# Altium PCB EverySyncBoard.PcbDoc.pcbdoc (part 2 of 2)
Units mil, origin at the board's own origin, x right, y up, seen from the top; angles counter-clockwise.
Board outline 3490 x 2630 mil, 2 copper layers (Top Layer, Bottom Layer); 156 components, 115 nets, 534 pads, 233 vias.
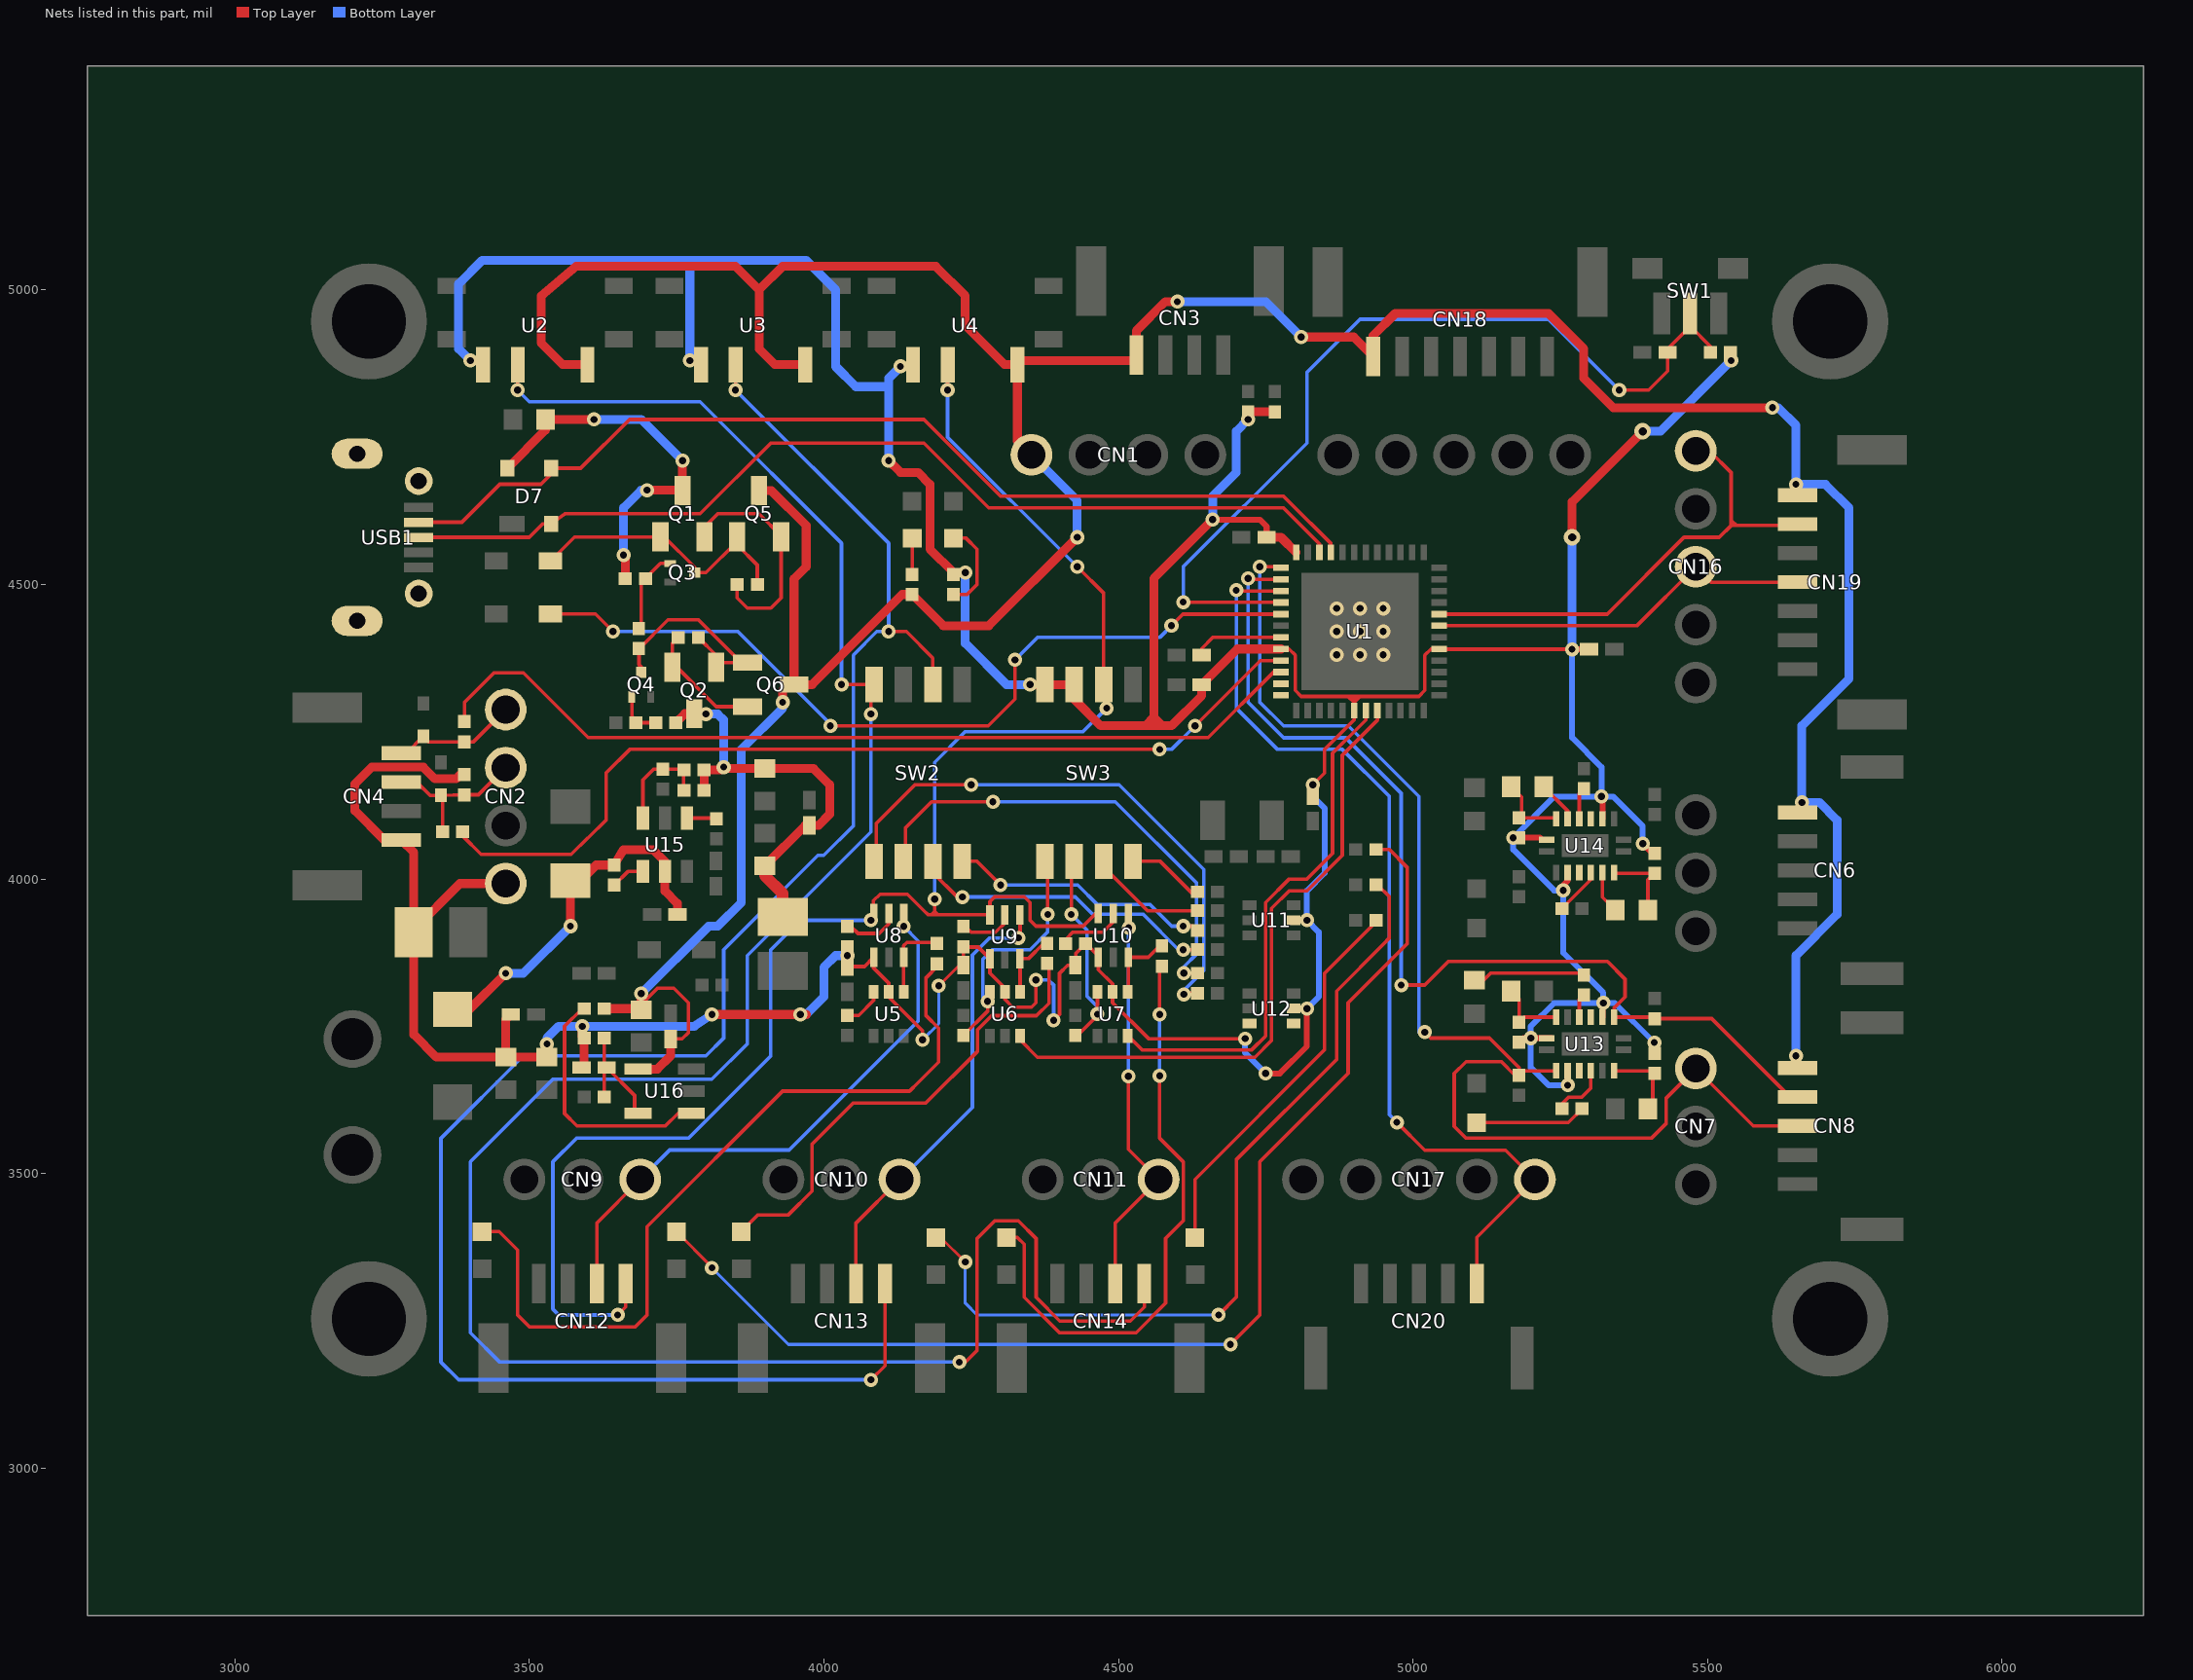
[diagram p2: the nets of this part, all layers, seen from the top]

## Via types
v1: diameter 24, hole 12, Top Layer to Bottom Layer, 231 vias
v2: diameter 28, hole 14, Top Layer to Bottom Layer, 2 vias

## Nets (pads, with @x,y where several pads share a name; then routed paths per layer and width w, separated by ;. In a path a pad name is that pad's centre, name@x,y a point inside that pad or via, vN(x,y) a via of type N, cw(c..) or ccw(c..) an arc to the next point about the centre after c; other vN are vias at no path point) (continued)
PA24_USB_DM: D7.3 U1.33 USB1.2 | length 1729
  Top Layer w6: USB1.2@3312.2,4605.58 3385.6,4605.59 3450,4670 3520,4670 3537.4,4687.39 D7.3@3537.4,4697.24 3587.25,4697.24 3670,4780 4170,4780 4300,4650 4380,4650 4780,4650 4790,4640 4860.79,4569.21 U1.33@4860.79,4554.15
PA25_USB_DP: D7.2 U1.34 USB1.3 | length 1679.5
  Top Layer w6: USB1.3@3312.2,4579.99 3500.01,4580 3522.76,4602.75 D7.2@3537.4,4602.75 3560,4620 3580,4620 3790,4620 3910,4740 4170,4740 4280,4630 4380,4630 4780,4630 4841.1,4568.9 U1.34@4841.1,4554.15
PA27_GPIO: CN17.1 CN20.1 U1.39 | length 1656.8
  Top Layer w6: v1(4700,4490) 4701.1,4488.9 U1.39@4775.85,4488.9 ; v1(4972.5,3587) 5019.81,3539.69 5060.27,3539.69 5157.27,3539.69 CN17.1@5207.27,3489.69 ; CN20.1@5108.4,3312.99 5108.4,3391.55 CN17.1@5206.85,3490
  Bottom Layer w6: v1(4700,4490) 4700,4290 4769.97,4220 4879.97,4220 4959.97,4140 4960,3600 ; 4959.97,3600 v1(4972.5,3587) ; v1(4972.5,3587) v1@4979.97,3587
PA28_USB_HOST_EN: D4.2 U1.41 | length 1437.7
  Top Layer w6: D4.2@3536.17,4450 3612.15,4450 v1(3641.88,4420.27) ; v1(4011,4260) 4279.01,4260 4324.5,4305.49 v1(4324.5,4372) ; v1(4590,4430) 4609.52,4449.53 U1.41@4775.85,4449.53
  Bottom Layer w6: v1(3641.88,4420.27) 3853.89,4420.27 4011,4263.15 v1(4011,4260) ; v1(4324.5,4372) 4362.5,4410 4570,4410 v1(4590,4430)
PA30_SWCLK: R2.1 U1.45 | length 1591.3
  Top Layer w6: R2.1@3387.27,4079.69 3387.27,4072.69 3418.27,4041.69 3571.27,4041.69 3630.27,4099.69 3630.27,4179.69 3670.57,4220 v1(4570,4220) ; v1(4630,4260) 4740.79,4370.79 U1.45@4775.87,4370.79
  Bottom Layer w6: v1(4570,4220) 4590,4220 v1(4630,4260)
PA31_SWDIO: R3.1 U1.46 | length 1531.1
  Top Layer w6: R3.1@3390,4267.04 3390,4300 3440,4350 3490,4350 3600,4240 4652.47,4240 4763.57,4351.1 U1.46@4775.87,4351.1
PB02_AIN10: U1.47
PB03_GPIO: U1.48
PB08_AIN2: U1.8 U6.3 | length 1111.8
  Top Layer w6: U6.3@4333.09,3736.09 4333.09,3727.06 4362.65,3697.5 4731.47,3697.5 4759.97,3725.97 4759.97,3949.96 4789.97,3980 4819.97,3980 4879.97,4040 4879.97,4210.01 4939.57,4269.54 U1.8@4939.57,4285.85
PB09_AIN3: U1.7 U7.3 | length 902.7
  Top Layer w6: U7.3@4515.59,3742.59 4515.59,3734.41 4540,3710 4726.47,3710 4749.97,3733.46 4749.97,3960 4789.97,4000 4819.97,4000 4863.47,4043.46 4863.47,4213.49 4919.87,4269.84 U1.7@4919.87,4285.85
PB10_S4_SPI_MOSI: CN16.3 CN19.4 U1.19 | length 661.1
  Top Layer w6: U1.19@5044.15,4429.84 5379.79,4429.84 CN16.3@5479.96,4530 5506.06,4503.9 CN19.4@5652.98,4503.9
PB11_S4_SPI_SCK: CN16.1 CN19.2 U1.20 | length 852.5
  Top Layer w6: U1.20@5044.15,4449.53 5329.53,4449.53 5460,4580 ; 5459.97,4580 5519.97,4580 5540,4600 ; CN16.1@5479.96,4726.85 5503.17,4726.85 5539.97,4690 5540,4600 ; 5539.97,4608.26 5549.33,4600 ; CN19.2@5656.51,4600 5540,4600
PB22_S5_TX: CN7.1 CN8.3 R27.2 U1.37 U13.2 | length 2200.3
  Top Layer w6: v1(4739.97,4530) 4774.12,4530 U1.37@4775.85,4528.27 ; v1(5020,3740) 5030,3730 5129.97,3730 5179.97,3679.99 R27.2@5180,3667.04 5172.97,3667.03 5149.97,3690 5089.97,3690 5069.97,3669.96 5069.97,3580.03 5089.97,3560 5404.47,3560 5429.97,3585.46 5429.97,3628.42 CN7.1@5479.99,3678.42 ; R27.2@5180,3667.04 5187.39,3674.43 U13.2@5242.86,3674.42 ; CN7.1@5479.99,3678.42 5577.71,3580.71 CN8.3@5652.98,3580.71
  Bottom Layer w6: v1(4739.97,4530) 4739.97,4300 4780.27,4259.69 4890.27,4259.69 5009.97,4140 5009.97,3740 v1(5020,3740)
PB23_S5_RX: CN8.2 R25.2 U1.38 U13.10 | length 1765
  Top Layer w6: v1(4720,4510) 4721.42,4508.58 U1.38@4775.85,4508.58 ; v1(4980,3820) 5019.97,3820 5059.97,3860 5318.47,3860 5330,3860 5360,3830 5360,3800 5341.28,3781.28 U13.10@5341.28,3765.56 5407.39,3765.57 R25.2@5410,3762.96 5507.04,3762.96 5640.09,3629.91 CN8.2@5652.98,3629.91
  Bottom Layer w6: v1(4720,4510) 4719.97,4300 4780.27,4239.69 4885.77,4239.69 4980,4145.46 v1(4980,3820)
PD_CAM1: R17.1 SW3.4 | length 134.8
  Top Layer w6: SW3.4@4525.01,4029.99 4571.15,4030 4628.17,3972.98 R17.1@4634.17,3978.26
PD_CAM2: R19.1 SW2.4 | length 447.6
  Top Layer w6: SW2.4@4235.01,4029.99 4260,4030 v1(4300,3990) ; v1(4610,3920) 4626.07,3920 R19.1@4633.81,3912.26
  Bottom Layer w6: v1(4300,3990) 4431,3990 4464.5,3956.5 4554,3956.5 4590.5,3920 v1(4610,3920)
PD_CAM3: R21.1 SW2.2 | length 810.4
  Top Layer w5.91: SW2.2@4138.89,4030.53 4138.89,4087.27 4182.89,4131.27 v1(4286.89,4131.26) ; v1(4610.89,3840.26) R21.1@4633.17,3840.27
  Bottom Layer w5.91: v1(4286.89,4131.26) 4494.74,4131.26 4632.84,3993.16 4632.84,3872.84 4610.89,3850.88 v1(4610.89,3840.26)
PU_CAM1: R16.2 SW3.3 | length 199.1
  Top Layer w6: SW3.3@4475.01,4029.99 4475.01,4020.49 4549.24,3946.26 R16.2@4633.81,3946.26
PU_CAM2: R18.2 SW2.3 | length 522.8
  Top Layer w6: SW2.3@4185.01,4029.99 4185.01,4010.99 4226.5,3969.5 v1(4235,3969.5) ; v1(4610,3880) 4634.19,3880 R18.2@4634.45,3880.27
  Bottom Layer w6: v1(4235,3969.5) 4426.65,3969.5 4456.15,3940 4542.18,3940 4602.18,3880 v1(4610,3880)
PU_CAM3: R20.2 SW2.1 | length 956.2
  Top Layer w5.91: SW2.1@4088.89,4030.53 4088.89,4094.26 4154.63,4160 v1(4250,4160)
  Top Layer w6: v1(4610.88,3804.27) 4612.87,3806.26 R20.2@4633.81,3806.26
  Bottom Layer w5.91: v1(4250,4160) 4501.15,4160 4644.74,4016.41 4644.74,3844.74 4610.89,3810.89 v1(4610.88,3804.27)
R2_2: CN2.3 CN4.3 D2.1 R2.2 R4.1 | length 268.7
  Top Layer w6: CN4.3@3282.99,4164.6 3308.9,4164.6 3331.46,4142.04 D2.1@3350,4142.04 ; R2.2@3352.96,4080 3352.96,4139.08 D2.1@3350,4142.04 ; CN2.3@3459.97,4189.16 3413.77,4142.96 R4.1@3390,4142.96 D2.1@3350,4142.04
R3_2: CN2.4 CN4.4 D1.1 R3.2 | length 215.1
  Top Layer w6: CN4.4@3282.99,4213.81 3291.76,4213.81 3320.01,4242.05 3329.1,4232.96 R3.2@3390,4232.96 3405.34,4232.96 CN2.4@3459.97,4287.59
R9_1: R9.1 U5.6 | length 69.5
  Top Layer w5.91: R9.1@4040,3768.54 4059.16,3768.54 4084.41,3793.79 U5.6@4084.39,3808.39
R10_1: LED1.2 R10.1 | length 1368.7
  Top Layer w5.91: LED1.2@3419.86,3401.47 3448.53,3401.47 3480,3370 3480,3260 3500,3240 3680,3240 3700,3260 3700,3410 3930,3640 4145.51,3640 4160.01,3654.5
  Top Layer w6: 4160.01,3654.5 4194.5,3688.99 4194.5,3747 4173.5,3768 4173.5,3832.5 4191.86,3850.85 R10.1@4191.85,3856.22 R10.1@4186.5,3856.22
R10_2: R10.2 U5.4 U8.3 | length 137.7
  Top Layer w5.91: U8.3@4135.47,3867.05 4135.47,3886.85 4140.89,3892.27 4190.6,3892.27 R10.2@4191.89,3890.98 ; U8.3@4135.48,3867.05 4135.59,3866.93 U5.4@4135.57,3808.39
R11_1: LED2.2 R11.1 | length 821.3
  Top Layer w5.91: LED2.2@3859.86,3401.47 3888.4,3430 3940,3430 3980,3470 3980,3549.99 4050.01,3620 4173.51,3620 4260.5,3707 4260.5,3743.5 4285,3768 4361,3768 4382,3789 4382,3856.46 R11.1@4379,3856.46
R11_2: R11.2 U6.4 U9.3 | length 110.5
  Top Layer w5.91: U6.4@4333.09,3810.89 U9.3@4333.06,3864.77 4347.28,3864.77 4373.05,3890.54 R11.2@4379,3890.54
R12_1: LED3.2 R12.1 | length 1013.3
  Top Layer w6: LED3.2@4309.86,3391.47 4328.53,3391.47 4340,3380 4340,3290 4400,3230 4530,3230 4580,3280 4580,3390 4610,3420 4610,3520 4570,3560 v1(4570,3666) ; v1(4570,3770) 4570,3848.36 R12.1@4573.85,3852.22
  Bottom Layer w6: v1(4570,3666) v1(4570,3770)
R12_2: R12.2 U7.4 U10.3 | length 126.3
  Top Layer w6: U7.4@4515.57,3808.39 4516.95,3809.76 4516.95,3867.04 4550.55,3867.04 4569.81,3886.3 R12.2@4573.85,3886.3 R12.2@4575.88,3887.27
R13_2: R13.2 U8.5 | length 99.5
  Top Layer w6: R13.2@4040,3919.3 4046.2,3919.3 4058,3907.5 4094,3907.5 4110.11,3923.61 U8.5@4110.07,3941.51
R14_2: R14.2 U9.5 | length 95.1
  Top Layer w5.91: R14.2@4236.85,3919.3 4240.2,3919.3 4250,3909.5 4291.5,3909.5 4307.51,3925.5 U9.5@4307.47,3939.21
R15_2: R15.2 U10.5 | length 118.5
  Top Layer w5.91: R15.2@4410.46,3890.5 4410.46,3897.49 4422.97,3910 4474.01,3910 4493.89,3929.88 U10.5@4493.89,3944.56
R22_1: LED4.2 R22.1 | length 1436.7
  Top Layer w5: LED4.2@4189.86,3391.47 4198.53,3391.47 v1(4240,3350)
  Top Layer w6: v1(4670,3260) 4700,3290 4700,3523.49 4870.27,3693.69 4870.27,3809.69 4950.27,3889.69 ; R22.1@4937.07,3990 4939.97,3990 4959.97,3970 4959.97,3900 4950,3890
  Bottom Layer w5: v1(4240,3350) 4240,3280 4260,3260 v1(4670,3260)
R23_1: LED5.2 R23.1 | length 665.8
  Top Layer w6: LED5.2@4629.86,3391.47 4629.87,3489.9 4849.97,3710 4849.97,3780 ; 4850,3780 4850,3840 4937.04,3927.04 R23.1@4937.04,3930
R24_1: LED6.2 R24.1 | length 2019.8
  Top Layer w5: LED6.2@3749.86,3401.47 3810,3341.34 v1(3810,3340)
  Top Layer w6: v1(4690,3210) 4739.97,3260 4739.97,3352.04 4739.97,3520 4889.97,3670 4889.97,3790 4989.97,3890 4989.97,4020 4959.97,4050 R24.1@4937.07,4050
  Bottom Layer w5: v1(3810,3340) 3940,3210 v1(4690,3210)
R29_1: C12.2 R29.1 U13.15 | length 124.9
  Top Layer w6: C12.2@5166.57,3810 5180,3796.57 R29.1@5180,3757.04 5188.53,3765.57 U13.15@5242.86,3765.56
R31_1: C13.2 R31.1 U13.7 | length 134.4
  Top Layer w6: U13.7@5341.28,3674.42 5405.53,3674.43 R31.1@5410,3669.96 ; C13.2@5397.56,3610 5407,3619.44 R31.1@5407,3669.96
R32_1: R32.1 RX2.1 | length 188.7
  Top Layer w6: RX2.1@5108.12,3586.5 5263.54,3586.5 R32.1@5287.04,3610
R35_1: R35.1 TX2.2 | length 177.8
  Top Layer w6: TX2.2@5119.97,3828.34 5131.57,3840 5289.97,3840 R35.1@5290,3837.04
R37_1: R37.1 U15.4 | length 59.2
  Top Layer w6: R37.1@3643.89,3988.83 3668.24,4013.19 U15.4@3692.97,4013.21
R39_1: R39.1 U15.1 | length 50.3
  Top Layer w6: U15.1@3767.78,4103.35 3817.52,4103.35 R39.1@3817.89,4102.98
R41_1: Q4.1 R41.1 R42.2 | length 77.2
  Top Layer w5.91: Q4.1@3674.26,4309.16 3674.26,4276.61 3685.6,4265.27 R41.1@3714.17,4265.27
R43_1: Q3.1 R43.1 R44.2 | length 144.5
  Top Layer w6: R44.2@3685.85,4425.3 3690,4425.3 3690,4502.96 R43.1@3697.04,4510 3722.78,4535.74 Q3.1@3739.16,4535.74
R44_1: Q2.1 Q4.3 Q6.1 R44.1 R47.1 | length 396.3
  Top Layer w5.91: Q4.3@3690.27,4350.69 3690.27,4359.69 3686.27,4363.69 3686.27,4390.69 3735.58,4440 3787.04,4440 3859.65,4367.39 Q6.1@3870.63,4367.4
  Top Layer w6: R47.1@3787.04,4410 3817.4,4379.64 Q2.1@3817.4,4359.37 3825.43,4367.4 Q6.1@3870.63,4367.4
R45_1: C20.1 R38.1 R45.1 U15.3 | length 177
  Top Layer w6: U15.3@3692.98,4103.35 3692.98,4168.36 3710.89,4186.27 3761.17,4186.27 3762.17,4185.27 C20.1@3762.17,4150.27
R46_1: D5.2 Q1.1 Q3.3 Q5.1 R46.1 | length 488.5
  Top Layer w6: D5.2@3536.17,4540 3576.8,4580.63 Q1.1@3722.6,4580.63 3729.37,4580.63 3780.85,4529.15 Q3.3@3780.85,4520 3800.01,4520 3852.6,4572.59 Q5.1@3852.6,4580.63 3852.6,4567.4 3887.04,4532.96 R46.1@3887.04,4500
R46_2: Q1.2 Q5.2 R46.2 | length 388.5
  Top Layer w6: Q1.2@3797.4,4580.63 3797.4,4597.4 3820,4620 3890,4620 3927.4,4582.6 Q5.2@3927.4,4580.63 3927.4,4477.39 3910,4460 3870,4460 3852.96,4477.04 R46.2@3852.96,4500
R47_2: Q2.2 Q6.2 R47.2 | length 210.6
  Top Layer w6: R47.2@3752.96,4410 3742.6,4399.64 Q2.2@3742.6,4359.37 3750.63,4359.37 3817.4,4292.6 Q6.2@3870.63,4292.6
R48_1: R48.1 U16.1 | length 432.2
  Top Layer w6: R48.1@3592.96,3780 3590.01,3780 3560,3750 3560,3602 3581,3581 3731,3581 3752.61,3602.6 U16.1@3781.19,3602.6
R49_1: LED11.2 R49.1 | length 61.5
  Top Layer w5.91: R49.1@4150,4517.04 4150.01,4560 4150.14,4560.13 LED11.2@4150.14,4578.52
R50_1: LED12.2 R50.1 | length 154.6
  Top Layer w6: R50.1@4220,4482.95 4242.96,4482.95 4260,4499.99 4260,4560 4241.48,4578.52 LED12.2@4220.14,4578.52
R51_1: C26.1 R51.1 R52.2 U16.5 | length 197
  Top Layer w6: R52.2@3627.04,3630 R51.1@3627.04,3730 ; C26.1@3631.46,3680 3678.82,3632.64 U16.5@3678.82,3602.6
RX2LED: R32.2 U13.5 | length 97.8
  Top Layer w6: R32.2@5252.96,3610 5252.97,3618.45 5263.97,3629.5 5286.47,3629.5 5301.87,3644.94 U13.5@5301.91,3674.42
RXLED: R34.2 U14.5 | length 81.4
  Top Layer w6: R34.2@5252.96,3950 5301.87,3998.95 U14.5@5301.87,4011.15
SLAVECAM2: R7.1 SW3.1 U6.6 | length 400.9
  Top Layer w6: R7.1@4236.85,3734.46 4277.88,3775.48 v1(4277.88,3792.27) ; SW3.1@4375.01,4029.99 4380,4025.01 v1(4380,3940)
  Bottom Layer w6: v1(4277.88,3792.27) 4270,3800.15 4270,3863.99 4286.01,3880 4350,3880 4380,3909.99 v1(4380,3940)
SLAVECAM3: R8.1 SW3.2 U7.6 | length 376.9
  Top Layer w6: v1(4420,3940) 4420,4030 SW3.2@4425.01,4029.99 ; R8.1@4426.85,3734.46 4430.46,3734.46 4465.5,3769.5 v1(4464.41,3770.59) U7.6@4464.39,3808.39
  Bottom Layer w6: v1(4420,3940) 4446.5,3913.5 4446.5,3801 4465.5,3782 v1@4465.5,3769.5
TRIGC1: CN9.1 CN12.2 U8.4 | length 986.3
  Top Layer w5.91: v1(4135.48,3919.52) U8.4@4135.47,3941.49 ; U8.4@4135.48,3941.49 U8.4@4135.48,3944.56
  Top Layer w6: CN12.2@3614.59,3312.99 3614.59,3416.19 CN9.1@3688.41,3489.99
  Bottom Layer w6: CN9.1@3688.41,3489.99 3738.41,3540 3941,3540 4160,3759 4160,3895 v1(4135.48,3919.52)
TRIGC2: CN10.1 CN13.2 U9.4 | length 768.4
  Top Layer w6: CN13.2@4054.59,3312.99 4054.59,3416.19 CN10.1@4128.41,3489.99 ; v1(4330,3900) 4333.09,3903.1 U9.4@4333.06,3939.21
  Bottom Layer w6: CN10.1@4130.55,3490.7 4252.14,3612.29 4252.14,3870.69 4281.45,3900 v1(4330,3900)
TRIGC3: CN11.1 CN14.2 U10.4 | length 680.8
  Top Layer w5.91: U10.4@4516.94,3941.49 4516.94,3917.56 v1(4517.5,3917)
  Top Layer w6: CN14.2@4494.6,3312.99 4494.6,3416.17 CN11.1@4568.43,3489.99 4517,3541.43 v1(4517,3665)
  Bottom Layer w5.91: v1(4517,3665) 4517,3916.5 v1(4517.5,3917)
TX2LED: R35.2 U13.13 | length 40.6
  Top Layer w6: U13.13@5282.23,3765.56 5282.22,3795.19 R35.2@5290,3802.96
TXLED: R36.2 U14.13 | length 53.9
  Top Layer w6: U14.13@5282.23,4102.26 5282.22,4145.18 R36.2@5290,4152.96
U1_40: C4.2 R1.1 SW1.2 U1.40 | length 1549.5
  Top Layer w6: v1(4610,4470) 4775.06,4470 U1.40@4775.85,4469.21 ; v1(5350,4830) 5400,4830 5432.04,4862.04 C4.2@5432.04,4893.88 ; C4.2@5432.04,4893.39 5432.04,4899.85 5470,4937.81 SW1.2@5470,4959.99 5470,4938.97 5504.54,4904.42 R1.1@5504.54,4894.39
  Bottom Layer w6: v1(4610,4470) 4610,4529.99 4819.97,4740 4819.97,4860 4909.97,4950 5229.97,4950 v1(5350,4830)
U1_43: C3.1 U1.43 | length 153.6
  Top Layer w6: C3.1@4641.46,4380 4641.46,4391.45 4660.17,4410.16 U1.43@4775.87,4410.16
U14_6: C15.1 U14.6 | length 73
  Top Layer w6: U14.6@5321.59,4011.15 5321.59,3969.2 C15.1@5343.57,3947.22
U14_7: C15.2 R33.1 U14.7 | length 136.5
  Top Layer w6: U14.7@5341.27,4011.15 5342.74,4009.68 R33.1@5410,4009.68 5398.69,3998.37 C15.2@5398.68,3947.22
U14_14: C14.1 U14.14 | length 71.3
  Top Layer w6: C14.1@5221.68,4156.73 5262.53,4115.88 U14.14@5262.54,4102.26
U14_15: C14.2 R30.1 U14.15 | length 123.7
  Top Layer w6: C14.2@5166.57,4156.73 5184.12,4139.17 R30.1@5184.12,4103.77 ; R30.1@5180,4103.77 5241.38,4103.76 U14.15@5242.85,4102.29
VBUS_5V: D7.4 L1.1 Q1.3 R43.2 | length 655.6
  Top Layer w15: D7.4@3462.6,4697.24 3527.56,4762.2 L1.1@3527.56,4779.99 v1(3610,4779.99) ; v1(3660,4550) 3662.96,4547.04 R43.2@3662.96,4510 ; v1(3700,4660) 3759.37,4660 Q1.3@3760,4659.37 v1(3760,4710)
  Bottom Layer w15: v1(3610,4779.99) 3690.01,4779.99 v1(3760,4710) ; v1(3660,4550) 3660,4630 3690,4660 v1(3700,4660)
VCAM1: CN12.1 SW3.6 U4.2 U8.6 U9.6 U10.6 | length 3041
  Top Layer w5.91: v1(4080,3930) 4080,3937.19 4084.29,3941.49 4084.29,3963.17 4095.38,3974.27 4141.88,3974.27 4168.38,3947.77 4176.93,3939.22 U9.6@4281.88,3939.21
  Top Layer w6: v1(3650,3260) 3663.8,3273.8 CN12.1@3663.8,3312.99 ; 4182.47,3939.22 4188,3944.75 ; v1(4188,3966) 4188,3944.75 ; 4193.5,3939.22 4188,3944.75 ; v1(4210,4830) 4210,4872.6 U4.2@4210.47,4873.07 ; U9.6@4281.88,3939.21 4281.92,3961.92 4290,3970 4340,3970 4350,3960 4350,3930 4360,3920 4440,3920 4461.49,3941.49 U10.6@4465.78,3941.51 ; v1(4430,4530) 4475.01,4484.99 SW3.6@4475.01,4329.99 4480,4325.01 v1(4480,4290)
  Bottom Layer w5.91: v1(4188,3966) 4188,4198 4239.75,4249.75 4439.74,4249.75 v1(4480,4290)
  Bottom Layer w6: v1(3650,3260) 3550,3260 3540,3270 3540,3520 3580,3560 3770,3560 3910,3700 3910,3880 3960,3930 v1(4080,3930) ; v1(4210,4830) 4210,4750 v1(4430,4530)
VCAM2: CN13.1 SW2.6 U3.2 | length 3368.7
  Top Layer w6: v1(3850,4830) U3.2@3850.47,4873.07 ; v1(4080,3150) 4103.8,3173.8 CN13.1@4103.8,3312.99 ; v1(4110,4420) 4140,4420 4185.01,4374.99 SW2.6@4185.01,4329.99
  Bottom Layer w6: v1(3850,4830) 4110,4570 v1(4110,4420) 4090.01,4420 4050,4380 4050,4170 4050,4090 4000,4040 3990,4040 3830,3880 3830,3730 3800,3700 3490,3700 3350,3560 3350,3180 3380,3150 v1(4080,3150)
VCAM3: CN14.1 SW2.8 U2.2 | length 4091.4
  Top Layer w6: v1(3480,4830) U2.2@3480.47,4873.07 ; v1(4030,4329.99) SW2.8@4085.01,4329.99 4080,4324.99 v1(4080,4280) ; v1(4230,3180) 4240.01,3180 4260.27,3200.26 4260.27,3390.26 4290,3420 4330,3420 4360.27,3389.73 4360.27,3290 4400.27,3249.69 4520.27,3249.69 4544.27,3273.69 CN14.1@4544.27,3312.69
  Bottom Layer w6: v1(3480,4830) 3500,4810 3740,4810 3790,4810 4030,4570 v1(4030,4329.99) ; v1(4080,4280) 4080,4080 3870,3870 3870,3720 3810,3660 3540,3660 3400,3520 3400,3230 3450,3180 3550,3180 v1(4230,3180)
VCC_3V3: C5.1 C6.1 C7.1 C8.1 C9.1 C10.1 C11.1 C26.2 C27.2 C28.2 C29.2 CN2.1 CN4.1 L3.2 R1.2 R4.2 R5.2 R6.2 R13.1 R14.1 R15.1 R29.2 R30.2 R31.2 R33.2 R50.2 R51.2 SW3.7 SW3.8 U1.6 U1.17 U1.36 U1.44 U2.3 U3.3 U4.3 U5.5 U6.5 U7.5 U8.1 U9.1 U10.1 U11.5 U12.5 U13.3 U13.11 U13.16 U14.3 U14.11 U14.16 | length 10435.8
  Top Layer w5: v1(4195,3819) 4229.71,3853.71 C9.1@4236.85,3853.72
  Top Layer w6: R13.1@4039.88,3884.55 C11.1@4040,3851.46 ; v1(4040,3870) C11.1@4040,3851.46 ; C11.1@4041.89,3851.98 4040.54,3851.98 C11.1@4040,3851.46 ; v1(4167.5,3727) 4167.5,3742.5 4110,3800 U5.5@4109.98,3808.39 4110,3823.5 4084.52,3848.98 4084.52,3867.04 4068.93,3851.45 C11.1@4040,3851.46 ; C9.1@4236.88,3849.98 4236.88,3884.55 4262.14,3884.55 U9.1@4281.88,3864.77 4281.91,3840.09 4307.5,3814.5 U6.5@4307.48,3808.39 4307.5,3795.5 4320.5,3782.5 4352.5,3782.5 4360,3790 v1(4360,3828.5) ; v1(4390,3760) 4400,3770 4400,3840 4413.71,3853.71 C10.1@4426.85,3853.72 ; C10.1@4427.86,3853.71 4427.86,3873.82 R15.1@4444.54,3890.5 4466.5,3868.54 4466.5,3849 ; C10.1@4427.89,3849.98 C10.1@4430.01,3852.11 ; U10.1@4465.77,3867.04 4465.77,3846.23 4490,3822 U7.5@4489.98,3808.39 4490,3790 4551,3729 v1(4715,3729) ; U1.44@4775.85,4390.47 4789.53,4390.47 4800,4380 4800,4320 4810,4310 4890,4310 ; U11.5@4797.38,3929.99 v1(4820,3930) ; v1(4830,4160) 4849.97,4180 4849.97,4219.99 4900.17,4270.16 U1.6@4900.16,4285.85 ; 4900.32,4300.16 4900.32,4310 ; v1(5270,4390) 5044.62,4390 5044.15,4390.47 5030.47,4390.47 5020,4380 5020,4320 5010,4310 4910,4310 ; 4890,4310 4910,4310 ; 4890,4310 4900.16,4299.84 U1.6@4900.16,4285.85 ; U1.6@4900.16,4285.85 4900.16,4300.16 4910,4310
  Top Layer w10: v1(4660,4610) 4740,4610 4751.46,4598.54 C8.1@4751.46,4580 ; v1(4750,3670) 4773.97,3670 4819.97,3715.96 v1(4820,3780) ; R29.2@5180,3722.96 5187.04,3730 v1(5200,3730) 5200.16,3729.84 U13.16@5234.75,3729.84 ; R30.2@5184.13,4069.68 5183.81,4070 v1(5170,4070) 5215.46,4070 U14.16@5218.89,4066.57 ; v1(5255,3980.5) 5254.97,3989.49 5262.57,3997.03 U14.3@5262.57,4011.15 ; v1(5262.5,3650) U13.3@5262.54,3674.42 ; v1(5270,4390) C6.1@5298.54,4390 ; v1(5320,4140) 5321.59,4138.41 U14.11@5321.6,4102.26 ; U13.11@5321.6,3765.56 5321.59,3788.1 v1(5323,3789.5) ; v1(5389.97,4060) 5406.21,4043.76 R33.2@5410,4043.76 ; R31.2@5407,3704.04 5407,3720 v1(5409.5,3722.5)
  Top Layer w15: R4.2@3390,4177.04 3383.04,4177.04 3376,4170 3340,4170 3320,4190 3232.51,4190 3204,4161.5 3204,4116 3253.8,4066.2 CN4.1@3282.99,4066.2 3304.04,4045.16 L3.2@3304.04,3910 ; v1(3400,4880) 3414.49,4880 U2.3@3421.42,4873.07 ; CN2.1@3459.97,3992.31 3382.31,3992.31 3304.04,3914.03 L3.2@3304.04,3910 ; C29.2@3468.54,3770 3460,3761.46 C27.2@3460,3697.55 ; v1(3530,3720) C28.2@3530,3697.55 C27.2@3460,3697.55 ; C26.2@3588.54,3680 3592.96,3684.42 R51.2@3592.96,3730 3590,3732.96 v1(3590,3750) ; v1(3772.61,4880) 3784.49,4880 U3.3@3791.42,4873.07 ; v1(3810,3770) v1@3969.99,3770 ; v1(4110,4710) 4130,4690 4160,4690 4180,4670 4180,4560 4220.01,4519.99 R50.2@4220,4517.03 4222.97,4520 v1(4240,4520) ; v1(4130,4870) 4148.34,4870 U4.3@4151.42,4873.07 ; v1(4350,4330) SW3.8@4375.01,4329.99 4415,4330 SW3.7@4425.01,4340 ; SW3.7@4425.01,4329.99 4425.01,4304.99 4470,4260 4590,4260 4641.46,4311.46 C5.1@4641.46,4330 4701.92,4390.47 U1.44@4775.85,4390.47 ; 4545.94,4260 4560,4274.46 ; 4574.45,4260 4560,4274.46 ; v1(4660,4610) 4560,4510 4560,4274.46 ; v1(4720,4780) R5.2@4720,4792.96 R6.2@4765.5,4792.96 ; C8.1@4751.46,4580 4775.88,4580 U1.36@4801.73,4554.15 ; v2(5270,4580) 5270,4640 v2(5390,4760) ; R1.2@5538.62,4893.88 5540,4892.5 v1(5540,4880) ; L3.2@3304.04,3910 3304.04,3735.96 3342.44,3697.56 C27.2@3460,3697.55
  Bottom Layer w5: v1(4167.5,3727) 4195,3754.5 v1(4195,3819)
  Bottom Layer w6: v1(4360,3828.5) 4381.5,3828.5 4390,3820 v1(4390,3760)
  Bottom Layer w10: v1(4715,3729) 4715,3705 v1(4750,3670) ; v1(4820,3780) 4840,3800 4840,3910 v1(4820,3930) ; v1@4820,3940 v1(4820,3930) ; v1@4829.97,4150 4829.97,4140 4849.97,4120 4849.97,4010 4820,3980.03 v1(4820,3930) ; v1(5170,4070) 5169.97,4050 5239.47,3980.5 v1(5255,3980.5) ; v1(5170,4070) 5240,4140 v1(5320,4140) ; v1(5255,3980.5) 5255,3875 5323,3807 v1(5323,3789.5) 5239.5,3789.5 5200,3750 v1(5200,3730) 5200,3680 5230,3650 v1(5262.5,3650) ; v1(5270,4390) 5270,4239.97 5320,4189.97 v1(5320,4140) ; v1(5323,3789.5) 5342.47,3789.5 v1(5409.5,3722.5) ; v1(5389.97,4060) 5389.97,4090 5339.97,4140 v1(5320,4140)
  Bottom Layer w15: v1(3400,4880) 3380,4900 3380,5010 3420,5050 3970,5050 4020,5000 4020,4870 4054.25,4835.75 4110,4835.75 ; v1(3530,3720) 3530,3730 3550,3750 v1(3590,3750) 3780,3750 v1(3810,3770) ; v1(3772.61,4880) 3772.61,5050 ; v1(3960,3770) 3970.01,3770 4000,3800 4000,3850 4020,3870 v1(4040,3870) ; v1(4110,4710) 4110,4850 v1(4130,4870) ; v1(4240,4520) 4240,4400 4310,4330 v1(4350,4330) ; v1(4660,4610) 4660,4649.99 4700,4690 4700,4759.99 v1(4720,4780) ; v1(5270,4390) v2(5270,4580) ; v2(5390,4760) 5420,4760 v1(5540,4880)
VCC_5V: C24.2 C25.2 CN1.1 CN3.1 CN6.1 CN8.1 CN18.1 CN19.1 Q5.3 Q6.3 R48.2 R49.2 U2.1 U3.1 U4.1 U16.4 | length 6595.9
  Top Layer w6: C24.2@3690,3777.55 3690,3787 3717.5,3814.5 3745.5,3814.5 3770,3790 3770,3739 3759.55,3728.54 C25.2@3740,3728.54
  Top Layer w15: U2.1@3598.58,4873.07 3556.93,4873.07 3520,4910 3520,4990 3580,5040 3850,5040 3890,5000 ; R48.2@3627.04,3780 3687.56,3780 C24.2@3690,3777.55 v1(3690,3805.5) ; U16.4@3678.82,3677.4 3717.41,3677.4 3740,3699.99 C25.2@3740,3728.54 ; Q5.3@3890,4659.37 3910.64,4659.36 3970,4600 3970,4530 3949.37,4509.37 Q6.3@3949.37,4330 ; v1(3930,4300) 3930,4320 3940.01,4330 Q6.3@3949.37,4330 ; Q6.3@3960,4330 Q6.3@3949.37,4330 ; U3.1@3968.58,4873.07 3916.93,4873.07 3890,4900 3890,5000 ; U4.1@4328.58,4880 CN3.1@4530.48,4880 ; CN1.1@4352.36,4720 4328.58,4743.78 4328.58,4873.07 4306.93,4873.07 4240,4940 4240,4990 4190,5040 3930,5040 3890,5000 ; v1(4430,4580) 4280,4430 4202.97,4430 R49.2@4150,4482.96 4132.96,4482.95 3980,4330 Q6.3@3949.37,4330 ; CN3.1@4530.48,4889.21 4530.48,4930.48 4580,4980 v1(4600,4980) ; v1(4810,4920) 4899.34,4920 CN18.1@4932.33,4887.01 4932.33,4922.33 4970,4960 5230,4960 5290,4900 5290,4850 5340,4800 v1(5610,4800) ; v1(5649.97,3700) 5649.97,3682.12 CN8.1@5652.98,3679.11 ; v1(5650,4670) 5650,4654.52 CN19.1@5652.98,4651.54 ; CN6.1@5652.98,4113.11 5659.97,4120.11 v1(5659.97,4130)
  Bottom Layer w15: v1(3690,3805.5) 3804.49,3920 3820,3920 3860,3960 3860,4220 3930,4290 v1(3930,4300) ; CN1.1@4352.36,4720 4430,4642.36 v1(4430,4580) ; v1(4600,4980) 4750,4980 v1(4810,4920) ; v1(5610,4800) 5620,4800 5650,4770 v1(5650,4670) ; v1(5649.97,3700) 5649.97,3870 5719.97,3940 5719.97,4100 5689.97,4130 v1(5659.97,4130) 5659.97,4260 5739.97,4340 5739.97,4352.44 5739.97,4630 5699.97,4670 v1(5650,4670)
VCC_5VIN: C20.2 C21.2 C22.2 C23.2 L2.2 Q2.3 R41.2 R45.2 | length 729.3
  Top Layer w15: R41.2@3748.89,4265.26 3764.26,4280.63 Q2.3@3780,4280.63 ; Q2.3@3780,4280 v1(3800,4280) ; C20.2@3796.89,4150.26 R45.2@3796.89,4185.26 3825.26,4185.26 v1(3830,4190) 3832.44,4187.56 C22.2@3900,4187.56 3982.44,4187.56 4010,4160 4010,4110 3990.81,4090.8 C23.2@3975.45,4090.8 3968.36,4090.8 C21.2@3900,4022.45
  Top Layer w20: C21.2@3900,4022.45 3900,4005.66 3930,3975.66 L2.2@3930,3935.96
  Bottom Layer w15: v1(3800,4280) 3820,4280 3830,4270 v1(3830,4190)
VCC_IN: C16.2 C17.2 D3.1 R37.2 U15.5 | length 628.7
  Top Layer w15: D3.1@3370,3778.74 3398.74,3778.74 v1(3460,3840) ; v1(3570,3920) C16.2@3570,3997.3 3587.31,3997.31 3613.6,4023.6 R37.2@3643.85,4023.6 3660,4050 3710,4050 3730.35,4029.65 3730.35,4013.18 3730.35,3979.65 3751.46,3958.54 C17.2@3751.46,3940
  Bottom Layer w15: v1(3460,3840) 3490,3840 v1(3570,3920)
"": U12.3 U12.4 U13.4 U13.12 U14.4 U14.12 USB1.SH0 USB1.SH1 USB1.SH2 USB1.SH3
  other v1: 4870.63,4380.63 4910,4380.63 4949.37,4380.63 4870.63,4420 4910,4420 4949.37,4420 4870.63,4459.37 4910,4459.37 4949.37,4459.37

## Polygon pours and split planes (outlines as drawn)
GND on Bottom Layer (solid, remove dead copper, pour order 0): 3030,5130 5990,5130 5990,3000 3000,3000 3000,3030
GND on Top Layer (solid, remove dead copper, pour order 1): 3060,5130 5950,5130 5950,3050 3050,3050

## Keep-outs
Board Outline Layer:
  lines w10 net "": 3090,3253.55 ccw(c3227.8,3253.55) 3227.8,3115.75 5708.1,3115.75 ccw(c5708.1,3253.55) 5845.9,3253.55 5845.9,4946.45 ccw(c5708.1,4946.45) 5708.1,5084.25 3227.8,5084.25 ccw(c3227.8,4946.45) 3090,4946.45 3090,3253.55

## Silkscreen, mask and mechanical layers (free items; w line width, h text height)
Top Silkscreen Layer:
  text "VCAM3" at 3543.72,5046.55 h22.97
  text "VCAM2" at 3916.28,5043.92 h22.97
  text "VCAM1" at 4276.07,5044.42 h22.97
  text "3V" at 3339.66,4851.29 h22.97
  text "5V" at 3629.66,4851.3 h22.97
  text "3V" at 3709.66,4851.29 h22.97
  text "5V" at 3999.66,4851.3 h22.97
  text "3V" at 4069.66,4851.29 h22.97
  text "5V" at 4359.66,4851.3 h22.97
  text "RESET" at 5428.83,4831.3 h22.97
  text "I2C" at 4479.38,4821.3 h22.97
  text "SPI2" at 5039.11,4821.3 h22.97
  text "5V" at 4332.16,4781.79 h22.97
  text "GND" at 4416.38,4781.79 h22.97
  text "SCL" at 4519.38,4782.29 h22.97
  text "SDA" at 4616.38,4782.29 h22.97
  text "SCK" at 4841.88,4782.3 h22.97
  text "MISO" at 4936.11,4782.3 h22.97
  text "MOSI" at 5034.11,4782.25 h22.97
  text "SS" at 5149.66,4781.3 h22.97
  text "DR" at 5249.66,4781.3 h22.97
  text "USB" at 3158.85,4772.43 h43.06
  text "SCK" at 5535.38,4713.8 h22.97
  text "5V" at 4129.66,4691.3 h22.97
  text "3V3" at 4189.38,4691.3 h22.97
  text "MISO" at 5535.11,4616.3 h22.97
  text "MOSI" at 5535.07,4516.3 h22.97
  text "SPI1" at 5369.11,4511.3 h22.97
  text "PU3" at 4071.29,4440.62 h22.97 r270
  text "PD3" at 4121.29,4440.62 h22.97 r270
  text "PU2" at 4171.29,4440.62 h22.97 r270
  text "PD2" at 4221.29,4440.62 h22.97 r270
  text "SL2" at 4361.29,4440.62 h22.97 r270
  text "SL3" at 4411.29,4440.62 h22.97 r270
  text "PU1" at 4461.29,4440.62 h22.97 r270
  text "PD1" at 4511.29,4440.62 h22.97 r270
  text "SS" at 5535.67,4421.3 h22.97
  text "SWD" at 3148.85,4342.43 h43.06
  text "DR" at 5539.66,4321.3 h22.97
  text "SWDIO" at 3518.83,4281.3 h22.97
  text "SWCLK" at 3518.83,4181.3 h22.97
  text "UART1" at 5528.83,4171.3 h22.97
  text "NMEA" at 5529.11,4091.3 h22.97
  text "GND" at 3339.38,4021.3 h22.97
  text "GND" at 5529.38,3991.3 h22.97
  text "3V3" at 3339.38,3971.3 h22.97
  text "PPS" at 5529.38,3901.3 h22.97
  text "LIDAR1" at 5518.55,3861.3 h22.97
  text "UART2" at 5528.83,3741.3 h22.97
  text "NMEA" at 5529.11,3661.3 h22.97
  text "NEU-RealLab" at 4441.4,3637.9 h63.88
  text "EverySync Project" at 3888.76,3626.31 h63.88
  text "Main Board v1.0" at 3882.97,3577.9 h63.88
  text "6-15V" at 3321.62,3571.46 h28.71 r270
  text "Desinged By Kang" at 4455.87,3566.31 h63.88
  text "GND" at 5529.38,3561.3 h22.97
  text "PPS" at 5529.38,3471.3 h22.97
  text "TRIG1" at 3428.65,3438.79 h23.93 r90
  text "EXPO1" at 3778.65,3438.79 h23.93 r90
  text "LIDAR2" at 5518.55,3431.3 h22.97
  text "TRIG2" at 3868.65,3428.79 h23.93 r90
  text "EXPO2" at 4218.65,3428.79 h23.93 r90
  text "TRIG1" at 4308.65,3428.79 h23.93 r90
  text "EXPO3" at 4658.65,3428.79 h23.93 r90
  text "GND" at 3459.38,3421.3 h22.97
  text "EXPO" at 3549.11,3421.3 h22.97
  text "TRIG" at 3649.11,3421.3 h22.97
  text "GND" at 3899.38,3421.3 h22.97
  text "EXPO" at 3989.11,3421.3 h22.97
  text "TRIG" at 4089.11,3421.3 h22.97
  text "GND" at 4340.98,3421.3 h22.97
  text "EXPO" at 4430.71,3421.3 h22.97
  text "TRIG" at 4530.71,3421.3 h22.97
  text "GND" at 4777.86,3421.3 h22.97
  text "PA10" at 4879.54,3421.3 h22.97
  text "PA05" at 4977.59,3421.4 h22.97
  text "PA04" at 5077.59,3421.3 h22.97
  text "PA27" at 5177.59,3421.3 h22.97
  text "CAM1" at 3549.11,3366.82 h22.97
  text "CAM2" at 3986.11,3366.82 h22.97
  text "CAM3" at 4424.11,3366.8 h22.97
  text "GPIO" at 4973.61,3366.81 h22.97

## Text inside footprints (layer, text, board x,y; h text height)
CN21: Top Silkscreen Layer "-" at 3187.26,3874.99 h37.37 r270; Top Silkscreen Layer "+" at 3182.26,3419.99 h37.37 r270
SW2: Top Silkscreen Layer "ON" at 4232.32,4240.27 h19.14 r270; Top Silkscreen Layer "ON" at 4182.32,4240.27 h19.14 r270; Top Silkscreen Layer "ON" at 4132.33,4240.27 h19.14 r270; Top Silkscreen Layer "ON" at 4082.32,4240.27 h19.14 r270
SW3: Top Silkscreen Layer "ON" at 4522.32,4240.27 h19.14 r270; Top Silkscreen Layer "ON" at 4472.32,4240.27 h19.14 r270; Top Silkscreen Layer "ON" at 4422.33,4240.27 h19.14 r270; Top Silkscreen Layer "ON" at 4372.32,4240.27 h19.14 r270